# Altium PCB touch_control_pickit_adapter..PcbDoc
Units mm, origin at the board's own origin, x right, y up, seen from the top; angles counter-clockwise.
Board outline 21.08 x 16.13 mm, 2 copper layers (Top Layer, Bottom Layer); 4 components, 7 nets, 18 pads, 3 vias.
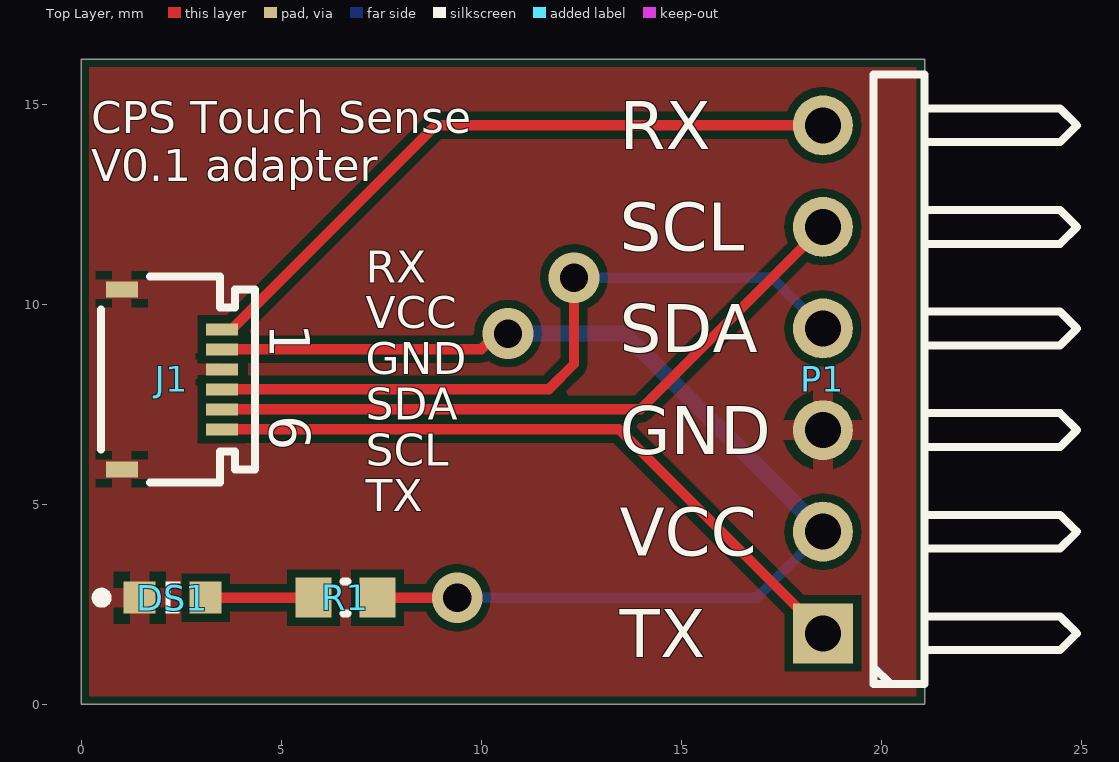
[diagram p0: Top Layer view]
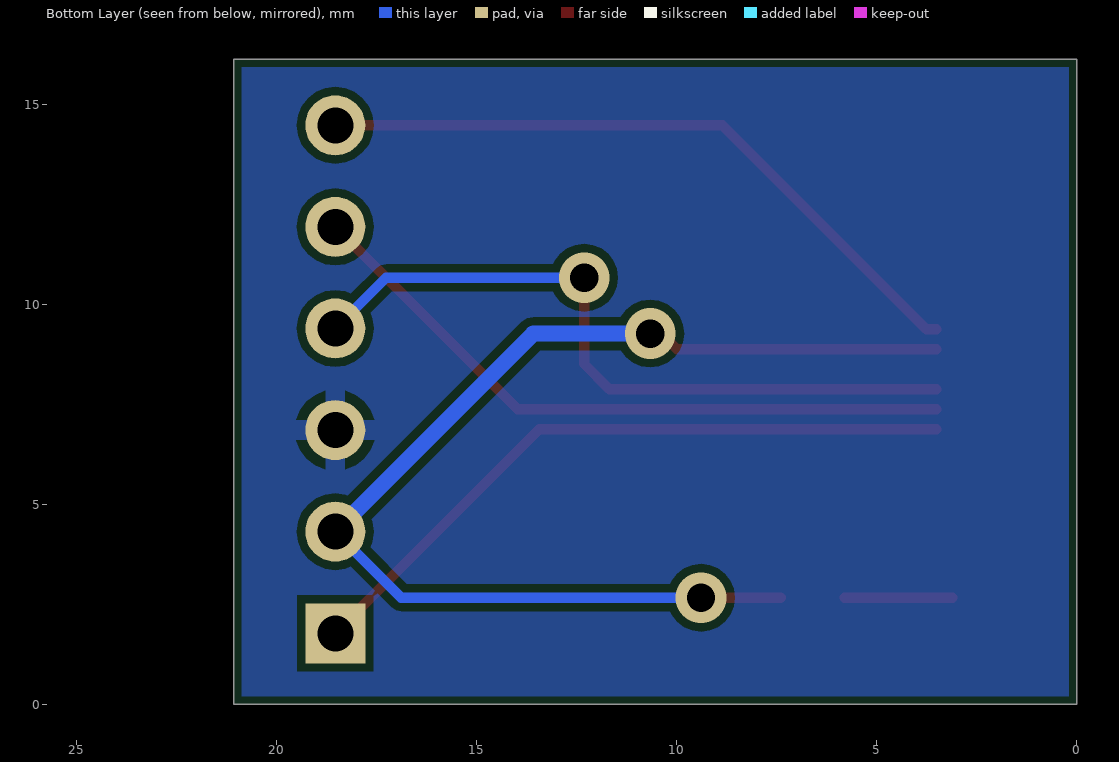
[diagram p1: Bottom Layer view, seen from below]

## Layer stack, top to bottom
Top Solder: solder mask 0.0102, Solder Resist, Dk 3.5
Top Layer: signal copper 0.0356
Dielectric 1: dielectric 0.32, FR-4, Dk 4.8
Bottom Layer: signal copper 0.0356
Bottom Solder: solder mask 0.0102, Solder Resist, Dk 3.5

## Board outline
0,0 21.082,0 21.082,16.129 0,16.129

## Design rules (kind name [scope] priority, off if disabled: settings)
BoardOutlineClearance [All] p1: gap=0.2 ignorepadtopadclearanceinfootprint=FALSE except(0.4: Arc-SplitBarrior Arc-SplitContinuation Track-SplitBarrior Track-SplitContinuation SMDPad-SplitBarrior SMDPad-SplitContinuation THPad-SplitBarrior THPad-SplitContinuation Via-SplitBarrior Via-SplitContinuation Fill-SplitBarrior Fill-SplitContinuation Poly-SplitBarrior Poly-SplitContinuation Region-SplitBarrior Region-SplitContinuation Text-SplitBarrior Text-SplitContinuation)
Clearance "Clearance Bottom Layer" [OnLayer('Bottom Layer')] p1: gap=0.203 ignorepadtopadclearanceinfootprint=TRUE except(0.254: Arc-Text Track-Text SMDPad-Text THPad-Text Via-Text Fill-Text Poly-Text Region-Text Text-Text)
Clearance "Clearance Top Layer" [OnLayer('Top Layer')] p2: gap=0.203 ignorepadtopadclearanceinfootprint=TRUE except(0.254: Arc-Text Track-Text SMDPad-Text THPad-Text Via-Text Fill-Text Poly-Text Region-Text Text-Text)
Clearance [All] p3: gap=0.2 ignorepadtopadclearanceinfootprint=FALSE except(0.089: Arc-Arc Arc-Track Arc-SMDPad Track-Track Track-SMDPad SMDPad-SMDPad; 0.127: Arc-Via Track-Via SMDPad-Via THPad-Via Via-Via; 0.254: Arc-Text Track-Text SMDPad-Text THPad-Text Via-Text Fill-Text Poly-Text Region-Text Text-Text)
HoleSize [All] p1: absolutevalues=TRUE maxlimit=6.3 minlimit=0.2 maxpercent=80.000 minpercent=20.000
MinimumAnnularRing [All] p1: minimumring=0.076
MinimumSolderMaskSliver [All] p1: minsoldermaskwidth=0.1
PolygonConnect PolygonConnect_1 [All] p1: thpad.connectstyle=Relief thpad.reliefconductorwidth=0.508 thpad.reliefentries=4 thpad.polygonreliefangle="90 Angle" thpad.airgapwidth=0.254 smdpad.connectstyle=Relief smdpad.reliefconductorwidth=0.508 smdpad.reliefentries=4 smdpad.polygonreliefangle="90 Angle" smdpad.airgapwidth=0.254 via.connectstyle=Direct via.reliefconductorwidth=0.508 via.reliefentries=4 via.polygonreliefangle="90 Angle" via.airgapwidth=0.254
RoutingCorners [All] p1: cornerstyle=Round minsetback=2.54 maxsetback=2.54
RoutingVias [All] p1: holewidth=0.5 width=1 viastyle="Through Hole" minholewidth=0.2 minwidth=0.45 maxholewidth=1 maxwidth=2
SilkToSilkClearance [All] p1: silktosilkclearance=0.1
SilkToSolderMaskClearance [IsPad] p1: minsilkscreentomaskgap=0.1 clearancetoexposedcopper=TRUE
SolderMaskExpansion [All] p1: expansion=0.102
Width [All] p1: maxlimit=2.54 minlimit=0.089 preferedwidth=0.381
25 further rules are at their usual default settings.

## Components (designator, comment, footprint, x,y, rotation, side; value= is the part's Value field where it differs from the comment)
DS1 "APG1608SURKC/T" KING-LED0603-25-RED_V 2.286,2.667 r180 top
J1 "687106182122" 687106182122 2.413,8.128 r270 top
P1 "Header 6H" HDR1X6H 18.542,1.778 r90 top
R1 "1K" RESC0603(1608)_N 6.604,2.667 r180 top value="10000.00 Ohm"

## Footprints (in the part's own frame and the unit in brackets; to place one, negate y for a bottom-side part, rotate by r counter-clockwise, add the part's x,y. Pads: shape width x height; smd on the part's side, far side on the other; paste and mask are expansions set on the pad)
687106182122 [mm] "ZIF Connectors, Horizontal, Dual Contact Back Locking, pitch 0.5mm, 6p"
  rect 0.3x0.8 smd: 1(-1.25,1.1) 2(-0.75,1.1) 3(-0.25,1.1) 4(0.25,1.1) 5(0.75,1.1) 6(1.25,1.1)
  rect 0.4x0.8 smd: MP1(-2.25,-1.4) MP2(2.25,-1.4)
  silkscreen extent -2.57,-1.92 2.58,1.92, body extent -2.5,-1.85 2.5,1.85, height 0.98
HDR1X6H [mm] "Connector; Header; 6 Position; Right Angle"
  rect 1.5x1.5 hole 0.9: 1(0,0)
  round 1.5 hole 0.9: 2(2.54,0) 3(5.08,0) 4(7.62,0) 5(10.16,0) 6(12.7,0)
  silkscreen extent -1.27,-6.35 13.97,-1.27
KING-LED0603-25-RED_V [mm] "LED, SMT, Body 1.6x0.8mm, 0.28mm Thickness, Red"
  rect 0.8x0.8 smd paste+0: 1(-0.825,0) 2(0.825,0)
  silkscreen extent -0.2,-0.4 1.9,0.4, body extent -0.8,-0.4 0.8,0.4, height 0.28
RESC0603(1608)_N [mm] "Chip Resistor, Body 1.6x0.8mm, IPC Medium Density"
  rect 0.9x1 smd: 1(-0.8,0) 2(0.8,0)
  silkscreen extent -0.05,-0.4 0.05,0.4, body extent -0.85,-0.47 0.85,0.47, height 0.6

## Part data
DS1: library part CMP-0404-00004-1, "Ultra Thin Hyper Red SMD Chip LED Lamp, 2 to 2.5 V, -40 to 85 degC, Body 1.6 x 0.8 mm, 0.28 mm Thickness, RoHS, Tape and Reel", Forward Voltage="2 to 2.5 V", Manufacturer=Kingbright, Operating Temperature="-40 to 85 degC", ComponentLink1Description="Manufacturer URL", ComponentLink1URL=http://www.kingbrightusa.com/, ComponentLink2Description=Datasheet, ComponentLink2URL=http://www.kingbrightusa.com/images/catalog/SPEC/APG1608SURKC-T.pdf, ComponentLink3Description="Package Specification", ComponentLink3URL=http://www.kingbrightusa.com/images/catalog/SPEC/APG1608SURKC-T.pdf, DatasheetVersion="Rev. V.5A", Dice="Hyper Red (AlGaInP)", IR (Max)="10 uA", Lens Type="Water Clear", Luminous Intensity mcd @ 20 mA (Min.)=55, Luminous Intensity mcd @ 20 mA (Typ.)=110, Mounting Technology="Surface Mount", PackageDescription="2-Pin SMT, Body 1.6 x 0.8 mm, 0.28mm Thickness, Red", PackageReference=LED0603-25-RED, PackageVersion="Rev. V.5A", Packing="Tape and Reel", PartNumber=APG1608SURKC/T, RoHS=TRUE, Viewing Angle=120
J1: library part CMP-1502-01645-1, "SMT ZIF Connectors WR-FPC, Horizontal, Back Locking Dual Contact, pitch 0.5 mm, 6 pins", Contact Resistance=30mOhm, Manufacturer="Wurth Elektronik", Operating Temperature=-55to85degC, Rated Current=0.5A, Withstanding Voltage=250VAC, Working Voltage=50VAC, Contact Design=BackLockingDualContact, Datasheet URL=https://katalog.we-online.de/em/datasheet/687106182122.pdf, Manufacturer URL=http://www.we-online.de, Mounting Technology=SMT, Orientation=Horizontal, Package Reference=687106182122, Packaging=TapeandReel, Part Number=687106182122, Pin Number=6, Pitch=0.5mm, Publisher=WurthElektronik
P1: "Header, 6-Pin, Right Angle", LatestRevisionDate=17-Jul-2002, LatestRevisionNote="Re-released for DXP Platform.", Publisher="Altium Limited"
R1: library part CMP-1012-00623-1, "10K 0.1W 1% 0603 (1608 Metric)  SMD", Case-EIA=0603, Case-Metric=1608, Power="0.1 W", Tolerance="1 %", Technology=SMT

## Via types
v1: diameter 1.27, hole 0.711, Top Layer to Bottom Layer, 3 vias

## Nets (pads, with @x,y where several pads share a name; then routed paths per layer and width w, separated by ;. In a path a pad name is that pad's centre, name@x,y a point inside that pad or via, vN(x,y) a via of type N, cw(c..) or ccw(c..) an arc to the next point about the centre after c; other vN are vias at no path point)
GND: DS1.2 J1.3 J1.MP1 J1.MP2 P1.3
NetDS1_1: DS1.1 R1.2 | length 2.7
  Top Layer w0.254: DS1.1 R1.2
RX: J1.1 P1.6 | length 17.1
  Top Layer w0.254: J1.1 3.763,9.378 8.863,14.478 P1.6
SCL_SY: J1.5 P1.5 | length 16.9
  Top Layer w0.254: J1.5 13.982,7.378 P1.5
SDA_SX: J1.4 P1.4 | length 18
  Top Layer w0.254: J1.4 11.688,7.878 12.319,8.509 v1(12.319,10.668)
  Bottom Layer w0.254: v1(12.319,10.668) 17.272,10.668 P1.4
TX: J1.6 P1.1 | length 17.1
  Top Layer w0.254: J1.6 13.442,6.878 P1.1
VCC: J1.2 P1.2 R1.1 | length 29.1
  Top Layer w0.254: J1.2 10,8.878 10.393,9.271 v1(10.668,9.271) ; R1.1 v1(9.398,2.667)
  Bottom Layer w0.254: v1(9.398,2.667) 16.891,2.667 P1.2
  Bottom Layer w0.406: v1(10.668,9.271) 13.589,9.271 P1.2

## Polygon pours and split planes (outlines as drawn)
GND on Bottom Layer "NONET_L04_P-001" (solid, pour order 0): 0,16.129 21.082,16.129 21.082,0 0,0
GND on Top Layer "NONET_L04_P-001" (solid, pour order 4): 0.035,16.143 21.117,16.143 21.117,0.014 0.035,0.014

## Silkscreen, mask and mechanical layers (free items; w line width, h text height)
Top Overlay:
  text "RX" at 13.462,13.878 h1.2
  text "CPS Touch Sense  / V0.1 adapter" at 0.254,13.081 h0.8
  text "SCL" at 13.462,11.338 h1.2
  text "RX" at 7.112,10.541 h0.8
  text "VCC" at 7.112,9.398 h0.8
  text "SDA" at 13.462,8.798 h1.2
  text "GND" at 7.112,8.255 h0.8
  text "SDA" at 7.112,7.112 h0.8
  text "GND" at 13.462,6.258 h1.2
  text "SCL" at 7.112,5.969 h0.8
  text "TX" at 7.112,4.826 h0.8
  text "VCC" at 13.462,3.718 h1.2
  text "TX" at 13.462,1.178 h1.2

## Text inside footprints (layer, text, board x,y; h text height)
J1: Top Overlay "6" at 4.713,7.228 h1.02 r270; Top Overlay "1" at 4.713,9.528 h1.02 r270